# Altium PCB CloudKon_WifiRelay.PcbDoc
Units mm, origin at the board's own origin, x right, y up, seen from the top; angles counter-clockwise.
Board outline 152.4 x 101.6 mm, 2 copper layers (Top Layer, Bottom Layer); 31 components, 20 nets, 110 pads, 48 vias.
Unrouted connection lines stored in the file: 2.
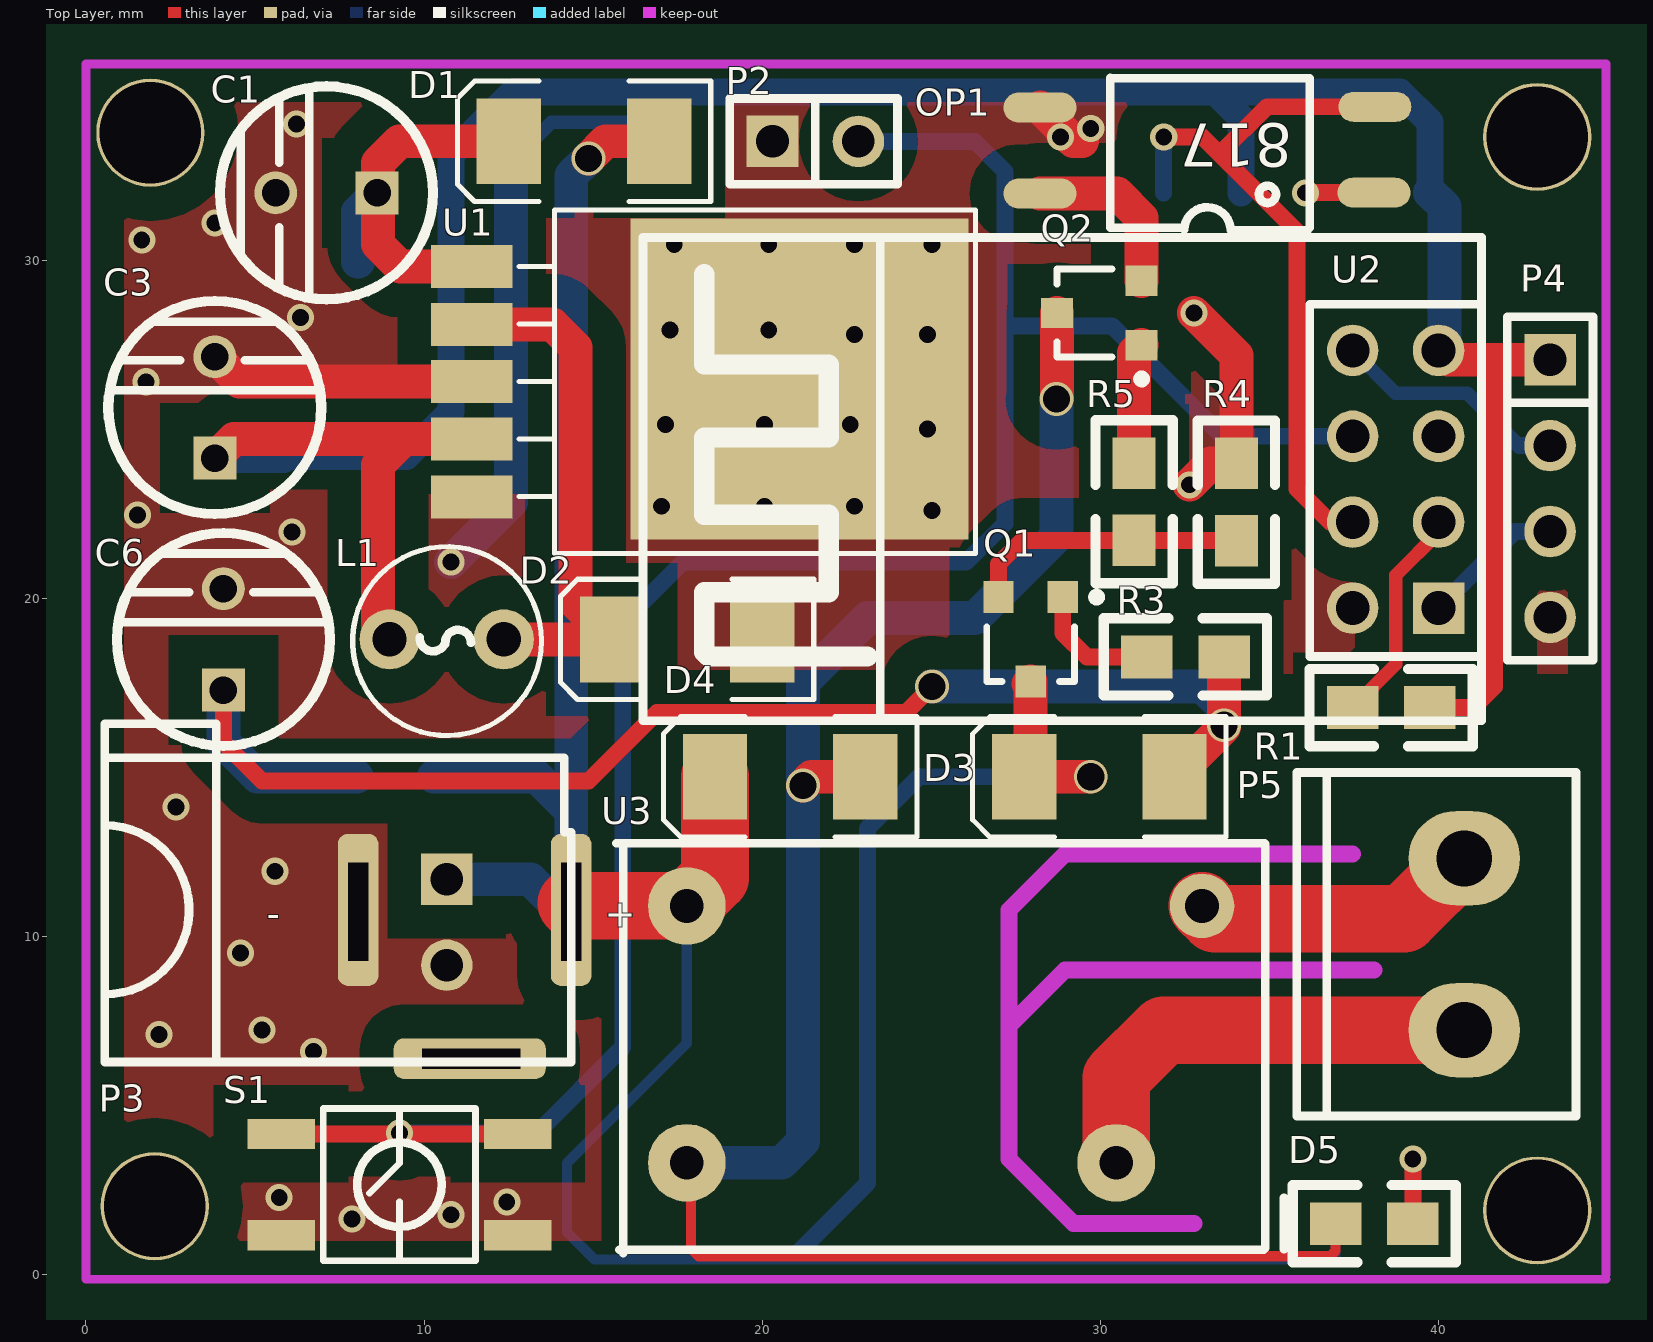
[diagram p0: Top Layer view]
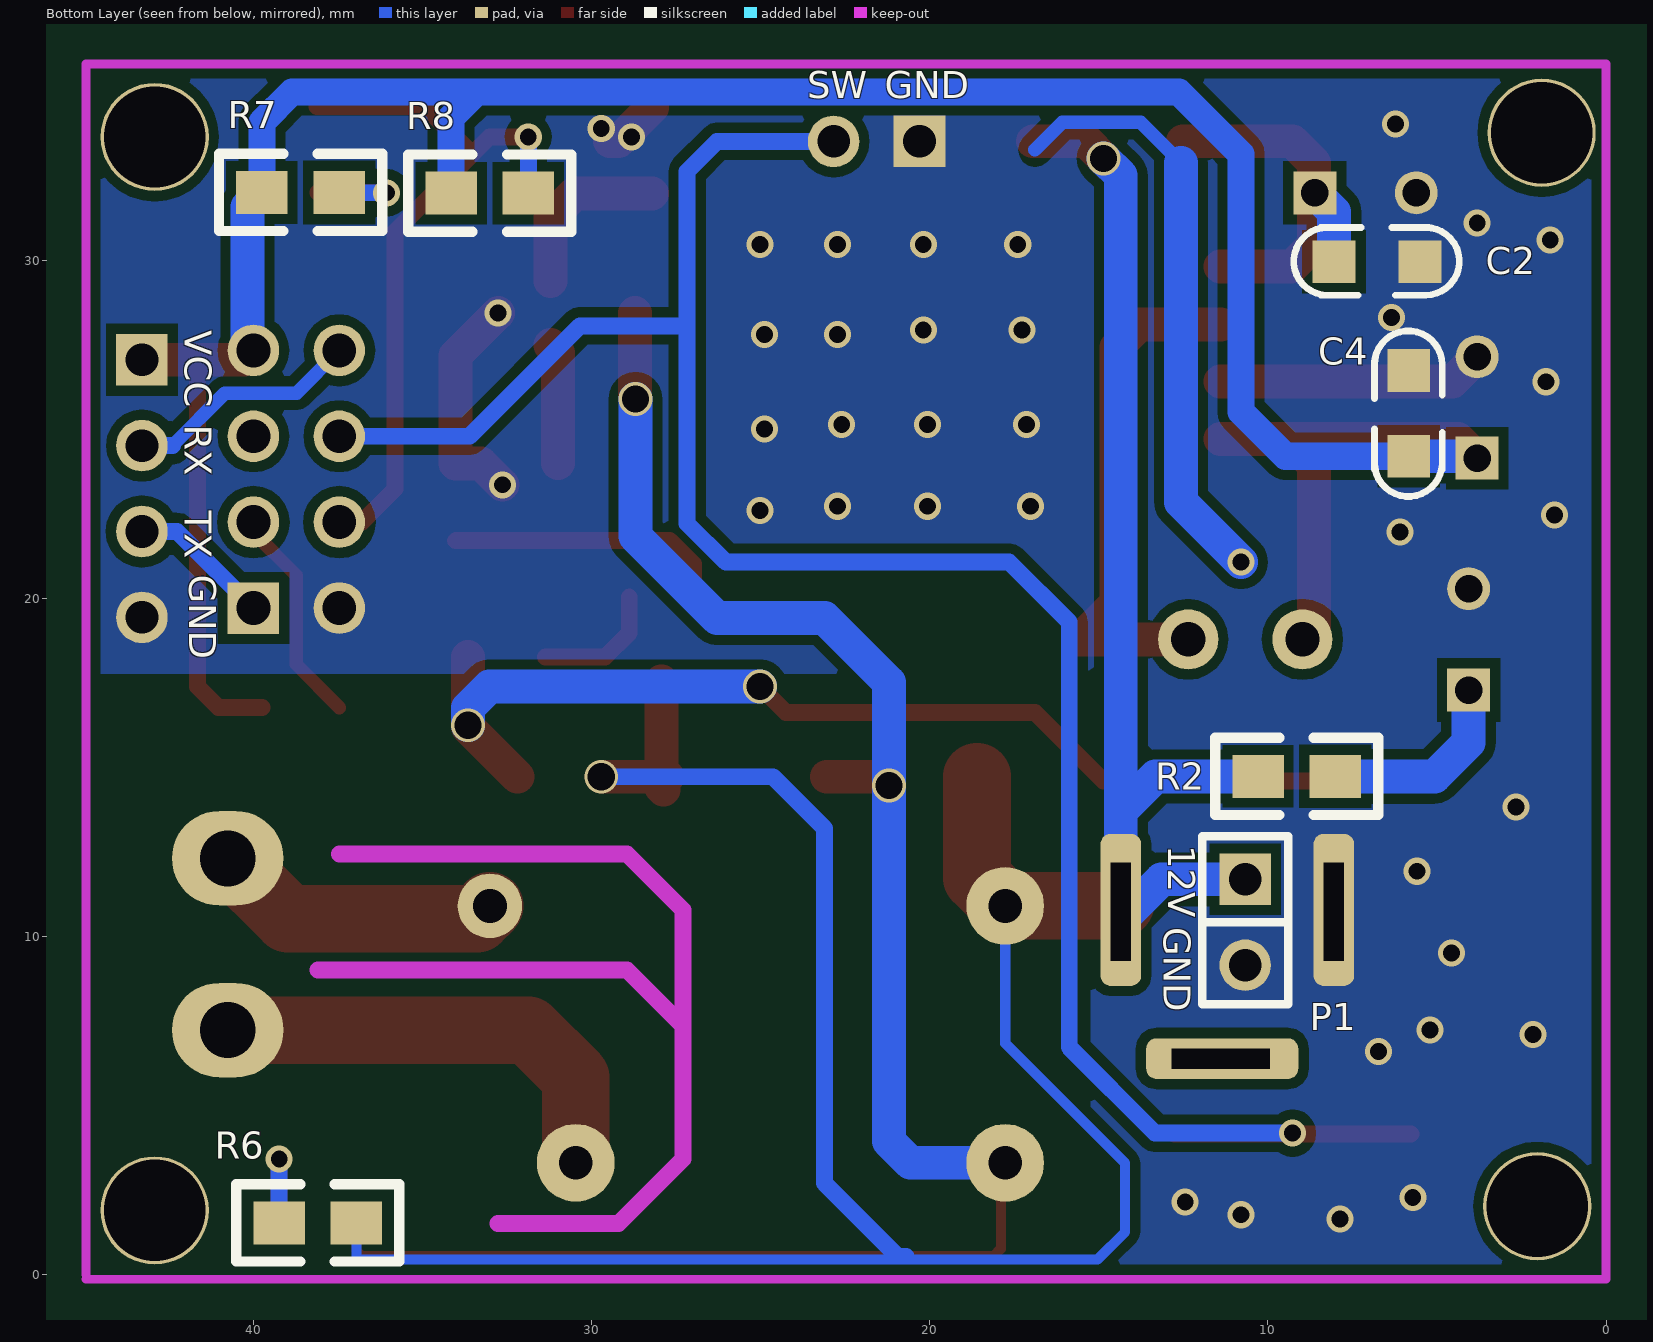
[diagram p1: Bottom Layer view, seen from below]

## Layer stack, top to bottom
Top Solder: solder mask 0.0102, Solder Resist, Dk 3.5
Top Layer: signal copper 0.0356
Dielectric1: dielectric 0.32, FR-4, Dk 4.8
Bottom Layer: signal copper 0.0356
Bottom Solder: solder mask 0.0102, Solder Resist, Dk 3.5

## Board outline
-37.465,-40.005 114.935,-40.005 114.935,61.595 -37.465,61.595

## Design rules (kind name [scope] priority, off if disabled: settings)
Clearance [All] p1: gap=0.3
FabricationTestPointUsage TestPointUsage [All] p1: valid=0 allowmultiple=FALSE
FabricationTestpoint Testpoint [All] p1: side=3 testpointundercomponent=TRUE minsize=1.016 maxsize=2.54 preferedsize=1.524 minholesize=0 maxholesize=1.016 preferedholesize=0.813 testpointgrid=0.025 allowsidetop=TRUE allowsidebottom=TRUE usegrid=TRUE gridtolerance=0
PlaneConnect [All] p1: planeconnectstyle=Relief reliefexpansion=0.508 reliefentries=4 reliefconductorwidth=0.508 reliefairgap=0.508
PolygonConnect [All] p1: connectstyle=Direct reliefconductorwidth=0.508 reliefentries=4 polygonreliefangle="90 Angle" airgapwidth=0.254
RoomDefinition CloudKon_WifiRelay [InComponentClass('CloudKon_WifiRelay')] p1: confinementstyle=ConfineIn formatcopy=TRUE lockcomponents=FALSE outline -62.865,-65.405 -12.065,-65.405 -12.065,-40.005 -62.865,-40.005
RoutingVias [All] p1: holewidth=0.711 width=1.27 viastyle="Through Hole" minholewidth=0.711 minwidth=1.27 maxholewidth=0.711 maxwidth=1.27
SilkToSolderMaskClearance SilkscreenOverComponentPads [IsPad] p1: minsilkscreentomaskgap=0.254 clearancetoexposedcopper=TRUE
SolderMaskExpansion [All] p1: expansion=0.102
Width [All] p1: maxlimit=2 minlimit=0.254 preferedwidth=0.5
26 further rules are at their usual default settings.

## Components (designator, comment, footprint, x,y, rotation, side; value= is the part's Value field where it differs from the comment)
C1 "Ecap_25V/100uf" "sip-cap-100uf-25v - duplicate" 7.112,32.004 r180 top
C2 "104" 0805_Cap 6.604,29.972 r0 bottom
C3 "Ecap_25V/100uf" "sip-cap-100uf-25v - duplicate" 3.81,25.654 r90 top
C4 "104" 0805_Cap 5.842,25.654 r270 bottom
C6 "Ecap_25V/100uf" "sip-cap-100uf-25v - duplicate" 4.064,18.796 r90 top
D1 "Diode_M7" M7 14.732,33.528 r90 top
D2 "Diode_SS14" M7 17.78,18.796 r90 top
D3 "Diode_SS14" M7 29.972,14.732 r90 top
D4 "Diode_SS14" M7 20.828,14.732 r90 top
D5 "LED_0805" 0805_LED 38.1,1.524 r180 top
L1 "220uH" LL_1A 10.668,18.796 r270 top
OP1 "EL817" E817-SMD 38.1,32.004 r90 top
P1 "HT5.08-2P" sip2 10.668,11.684 r270 bottom
P2 "HT5.08-2P" sip2 20.32,33.528 r0 top
P3 "DC-005" DC-5.5-2.1mm 14.351,10.795 r0 top
P4 "Esp8266_debug" sip4 43.307,27.051 r270 top
P5 "HT5.08-2P" HP2PA-5.08 40.767,7.239 r90 top
Q1 "NPN_S8050" SOT-23 27.94,18.796 r180 top
Q2 "NPN_S8050" SOT-23 29.972,28.448 r90 top
R1 "10K_1%" 0805_Res 38.608,16.764 r0 top
R2 "150K_1%" 0805_Res 9.144,14.732 r180 bottom
R3 "6K8_5%" 0805_Res 32.512,18.288 r180 top
R4 "6K8_5%" 0805_Res 34.036,22.86 r90 top
R5 "6K8_5%" 0805_Res 30.988,22.86 r270 top
R6 "2K_5%" 0805_Res 38.1,1.524 r180 bottom
R7 "100R_5%" 0805_Res 38.608,32.004 r180 bottom
R8 "5K1_5%" 0805_Res 33.02,32.004 r0 bottom
S1 "Switch_6*6*5" 4.5*4.5MM_SW 9.271,2.667 r0 top
U1 "LM2576S-3.3" LM2575-1 16.256,26.416 r0 top
U2 "ESP8266-1" ESP8266-1 41.275,16.383 r90 top
U3 "HF_Relay" JZ-32F-A 25.4,7.112 r0 top

## Footprints (in the part's own frame and the unit in brackets; to place one, negate y for a bottom-side part, rotate by r counter-clockwise, add the part's x,y. Pads: shape width x height; smd on the part's side, far side on the other; paste and mask are expansions set on the pad)
4.5*4.5MM_SW [mm]
  rect 2x0.9 smd: 1(-3.5,1.5) 1(3.5,1.5) 2(-3.5,-1.5) 2(3.5,-1.5)
  silkscreen extent -2.25,-2.25 2.25,2.25
0805_Cap [mm]
  rect 1.27x1.27 smd: 1(-1.097,0.007) 2(1.443,0.007)
  silkscreen extent -2.26,-1 2.63,1
0805_LED [mil]
  rect 60x50 smd: 1(-45.18,0.46) 2(44.82,0.46)
  silkscreen extent -95,-45 105,45
0805_Res [mil]
  rect 60x50 smd: 1(-45.18,0.46) 2(44.82,0.46)
  silkscreen extent -95,-45 95,45
DC-5.5-2.1mm [mm]
  rrect50% 0.6x0.6 / inner round 0 / far side round 0 hole 0.6 square: 1(0,-1.2) 1(0,-0.9) 1(0,-0.6) 1(0,-0.3) 1(0,0.2) 1(0,0.5) 1(0,0.8) 1(0,1.1) 2(-6.3,-1.2) 2(-6.3,-0.9) 2(-6.3,-0.6) 2(-6.3,-0.3) 2(-6.3,0.2) 2(-6.3,0.5) 2(-6.3,0.8) 2(-6.3,1.1) 3(-4.1,-4.4) 3(-3.9,-4.4) 3(-3.5,-4.4) 3(-2.5,-4.4) 3(-2.25,-4.4) 3(-2,-4.4) 3(-1.8,-4.4)
  rrect50% 1.2x4.5 hole 0.6 square: 1(0,0) 2(-6.3,0)
  rrect50% 4.5x1.2 hole 0.6 square: 3(-3,-4.4)
  silkscreen extent -13.8,-4.5 0,5.5
E817-SMD [mil]
  oval 35x85 smd: 1(0.16,0.18) 2(100.16,-0.82) 3(99.16,389.18) 4(-0.84,389.18)
  silkscreen extent -44,75 134,307
ESP8266-1 [mm]
  rect 1.524x1.524 hole 1: 1(3.34,1.27)
  round 1.524 hole 1: 2(5.88,1.27) 3(8.42,1.27) 4(10.96,1.27) 5(10.96,3.81) 6(8.42,3.81) 7(5.88,3.81) 8(3.34,3.81)
  silkscreen extent 0,0 14.3,24.8
HP2PA-5.08 [mil]
  oval 110x130 hole 65: 1(0,0) 2(200,0)
  silkscreen extent -100,-130 300,195
JZ-32F-A [mm]
  round 2.3 hole 1: 1(5.071,-3.798) 4(-7.629,3.802) 5(-7.629,-3.798)
  round 1.905 hole 1: 2(7.611,3.802)
  silkscreen extent -9.72,-6.47 9.48,5.65
LL_1A [mil]
  round 70 hole 40: 1(0,66.5) 2(0,-66.5)
  silkscreen extent -108,-109 112,110
LM2575-1 [mil]
  rect 393.7x374.02 smd: 0(190.92,3.07)
  rect 95x50 smd: 1(-190.92,134.08) 2(-190.92,66.51) 3(-190.92,0.31) 4(-190.92,-66.69) 5(-190.92,-134.08)
  silkscreen extent -136,-200 396,200
M7 [mil]
  rect 100x75 smd: A(0,-87.5) K(0,87.5)
  silkscreen extent -70,-147 70,148
sip2 [mil]
  rect 60x60 hole 38: 1(-0.6,-0.17)
  round 60 hole 38: 2(99.4,-0.17)
  silkscreen extent -51,-50 145,50
sip4 [mil]
  rect 60x60 hole 38: 1(-0.6,-0.17)
  round 60 hole 38: 2(99.4,-0.17) 3(199.4,-0.17) 4(299.4,-0.17)
  silkscreen extent -51,-50 349,50
"sip-cap-100uf-25v - duplicate" [mm]
  rect 1.27x1.27 hole 0.813: 1(-1.5,0)
  round 1.27 hole 0.813: 2(1.5,0)
  silkscreen extent -3.15,-3.15 3.15,3.15
SOT-23 [mm] "SOT-23; 3 Leads; Body 3.0 x 2.6 mm, inc. leads (LxW max)"
  rect 0.9x0.95 smd: 1(-0.95,-1.25) 2(0.95,-1.25) 3(0,1.25)
  silkscreen extent -2.08,-1.37 1.3,1.25

## Part data
C1 C3 C6: "https://item.taobao.com/item.htm?spm=a1z10.5-c.w4002-11020631983.33.qoX6of&id=7423722992"
C2 C4: library part Cap_%10, "https://item.taobao.com/item.htm?spm=a1z09.2.0.0.hNveX1&id=9716419590&_u=7ok62qs2673"
D1: "https://item.taobao.com/item.htm?spm=a1z10.3-c.w4002-11020657456.37.E0r8Bv&id=2891923922"
D2 D3 D4: "https://item.taobao.com/item.htm?spm=a1z10.3-c.w4002-11020657456.14.qD67rq&id=6126767310"
D5: "https://item.taobao.com/item.htm?spm=a1z10.3-c.w4002-11020657456.51.Ytz1qg&id=5169670346"
L1: library part LL_220uH, "https://item.taobao.com/item.htm?spm=a1z10.3-c.w4002-11020657456.14.KHn9vQ&id=8986036232"
OP1: "https://item.taobao.com/item.htm?spm=a1z10.3-c.w4002-11020657456.9.xiQJya&id=9840822052"
P1 P2 P5: "https://item.taobao.com/item.htm?spm=a1z10.3-c.w4002-11020657456.22.46QWsT&id=19327735027"
P3: "https://item.taobao.com/item.htm?spm=a1z10.3-c.w4002-11020657456.12.3OzBHB&id=5709638982"
P4: "https://item.taobao.com/item.htm?spm=a1z10.3-c.w4002-11020657456.14.NtUqGh&id=6097555742"
Q1 Q2: "https://item.taobao.com/item.htm?spm=a1z10.3-c.w4002-11020657456.15.ysrU5Y&id=5957247576"
R1 R2 R3 R4 R5 R6 R7 R8: library part Res_%5, "https://item.taobao.com/item.htm?spm=a1z10.3-c.w4002-11020657456.13.233szV&id=14686636311"
S1: "https://item.taobao.com/item.htm?spm=a1z10.3-c.w4002-11020657456.46.btOzYB&id=6756135544"
U1: "https://item.taobao.com/item.htm?spm=a1z10.3-c.w4002-11020657456.21.xl3HJG&id=6674225198"
U2: "https://item.taobao.com/item.htm?spm=a1z10.3-c.w4002-5350375195.29.OjbIzM&id=40328222213"
U3: "https://item.taobao.com/item.htm?spm=a1z10.1-c.w9983160-11020631947.1.6Rxoz9&id=10387236348"

## Free pads (board coordinates)
  round 3.2 hole 3: 0(1.905,33.782) 0(2.032,2.032) 0(42.926,1.905) 0(42.926,33.655)

## Via types
v1: diameter 0.8, hole 0.5, Top Layer to Bottom Layer, 42 vias
v2: diameter 1, hole 0.8, Top Layer to Bottom Layer, 6 vias

## Nets (pads, with @x,y where several pads share a name; then routed paths per layer and width w, separated by ;. In a path a pad name is that pad's centre, name@x,y a point inside that pad or via, vN(x,y) a via of type N, cw(c..) or ccw(c..) an arc to the next point about the centre after c; other vN are vias at no path point)
COM: P5.1 U3.1 | length 13.4
  Top Layer w2: U3.1 30.471,5.833 31.877,7.239 P5.1
GND: C1.2 C2.1 C3.2 C4.1 C6.2 D2.A OP1.3 P1.2 P2.1 P3.2 P4.4 R4.2 S1.2 U1.0 U1.3 U1.5 U2.8 | length 33.9
  Top Layer w1: C3.2 4.54,26.424 U1.3 ; OP1.3 29.209,33.528 29.464,33.528 ; v1(32.639,23.368) 33.269,23.998 R4.2 34.024,27.19 v1(32.766,28.448)
  Bottom Layer w0.4: 12.573,32.893 13.767,34.087 16.078,34.087 16.891,33.274
  Bottom Layer w1: v1(10.795,21.082) 12.573,22.86 12.573,32.893
  other v1: 7.874,1.651 10.795,1.778 12.446,2.159 5.715,2.286 6.731,6.604 2.159,7.112 5.207,7.239 4.572,9.525 5.588,11.938 2.667,13.843 6.096,21.971 1.524,22.479 25.019,22.606 17.018,22.733 20.066,22.733 22.733,22.733 24.892,25.019 17.145,25.146 20.066,25.146 22.606,25.146 1.778,26.416 22.733,27.813 24.892,27.813 17.272,27.94 20.193,27.94 6.35,28.321 17.399,30.48 20.193,30.48 22.733,30.48 25.019,30.48 1.651,30.607 3.81,31.115 28.829,33.655 29.718,33.909 6.223,34.036
NetC1_1: C1.1 C2.2 D1.K U1.1 | length 11.9
  Top Layer w1: C1.1 C1.1@8.636,31.98 ; U1.1 9.294,29.822 8.636,30.48 C1.1@8.636,31.98 ; D1.K 9.271,33.528 8.636,32.893 C1.1@8.636,31.98
  Bottom Layer w1: C2.2 8.047,31.439 C1.1
NetC6_1: C6.1 D3.A R2.2 R3.1 | length 43.8
  Top Layer w0.5: C6.1 4.064,15.748 5.207,14.605 14.859,14.605 16.891,16.637 24.257,16.637 v2(25.019,17.399) v2@25.146,17.526
  Top Layer w1: D3.A 33.66,16.197 R3.1
  Bottom Layer w1: C6.1 4.064,15.748 5.068,14.744 R2.2 ; v2(25.019,17.399) 33.02,17.399 33.655,16.764 v2(33.655,16.256)
NetD2_K: D2.K L1.1 U1.2 | length 15.6
  Top Layer w1: U1.2 13.805,28.105 14.478,27.432 14.478,19.875 D2.K L1.1
NetD4_A: D4.A D5.2 Q2.3 U3.5 | length 57.7
  Top Layer w0.3: U3.5 17.898,3.187 17.898,0.771 18.119,0.55 36.803,0.55 36.962,0.709 D5.2
  Top Layer w1: v2(21.209,14.478) 21.463,14.732 D4.A ; v2@28.722,25.928 Q2.3
  Bottom Layer w1: U3.5 20.574,3.314 21.209,3.949 v2(21.209,14.478) 21.209,17.526 23.114,19.431 26.289,19.431 28.702,21.844 v2(28.702,25.908)
NetD5_1: D5.1 R6.1 | length 3.8
  Top Layer w0.5: v1(39.243,3.429) 39.248,3.424 D5.1
  Bottom Layer w0.5: R6.1 v1@39.248,3.424
NetOP1_1: OP1.1 R7.2 | length 3.4
  Top Layer w0.5: v1(36.068,32.004) 36.072,32.008 OP1.1
  Bottom Layer w0.5: v1(36.068,32.004) 37.458,32.004 R7.2
NetOP1_4: OP1.4 Q2.2 | length 5.2
  Top Layer w1: OP1.4 30.501,31.983 31.222,31.262 Q2.2
NetP2_2: P2.2 S1.1 U2.6 | length 66.5
  Top Layer w0.5: S1.1@5.771,4.167 S1.1@12.771,4.167
  Bottom Layer w0.5: v1(9.271,4.191) 13.335,4.191 15.875,6.731 15.875,19.304 17.653,21.082 26.035,21.082 27.178,22.225 27.178,28.067 ; P2.2 26.293,33.524 27.178,32.639 27.178,28.067 ; U2.6 33.617,24.803 30.353,28.067 27.178,28.067
NetQ1_1: Q1.1 R3.2 | length 3.8
  Top Layer w0.5: Q1.1 28.89,18.989 29.603,18.276 R3.2
NetQ1_2: Q1.2 R4.1 R5.2 | length 8.3
  Top Layer w0.5: Q1.2 26.99,21.021 27.691,21.722 R5.2 34.015,21.722 R4.1
NetQ2_1: Q2.1 R5.1 | length 3.6
  Top Layer w1: R5.1 31,27.276 Q2.1
NetR1_1: R1.1 U2.2 | length 6.5
  Top Layer w0.4: R1.1 38.743,18.058 38.743,20.692 40.005,21.954 U2.2
OUT: P5.2 U3.2 | length 9.2
  Top Layer w0.3: 38.6,10.914 38.981,10.533
  Top Layer w2: U3.2 33.392,10.533 38.981,10.533 P5.2
RELAYCON: OP1.2 R8.1 U2.7 | length 21.6
  Top Layer w0.5: v1(31.877,33.655) 33.02,33.655 33.528,33.147 ; U2.7 36.792,22.263 35.814,23.241 35.814,30.861 33.528,33.147 ; OP1.2 34.929,34.548 33.528,33.147
  Bottom Layer w0.5: R8.1 v1@31.872,33.65
VCC_3.3: C3.1 C4.2 L1.2 P4.1 R1.2 R7.1 R8.2 U1.4 U2.4 | length 85.2
  Top Layer w0.5: R1.2 41.033,16.776 41.656,17.399 41.656,26.685 42.037,27.066
  Top Layer w1: C3.1 4.378,24.722 9.398,24.722 ; L1.2 8.636,19.139 8.636,23.96 9.398,24.722 ; U1.4 9.398,24.722 ; U2.4 40.282,27.066 42.037,27.066 P4.1
  Bottom Layer w0.8: C4.2 9.479,24.211 10.795,25.527 10.795,33.147 12.635,34.987 33.401,34.987 ; R8.2 34.158,34.23 33.401,34.987 ; R7.1 39.756,34.093 38.862,34.987 33.401,34.987
  Bottom Layer w1: C3.1 3.867,24.211 C4.2 ; R7.1 40.178,31.594 40.178,29.584 40.178,27.516 U2.4
VCC_12V: D1.A D3.K D4.K P1.1 P3.1 Q1.3 R2.1 R6.2 U3.4 | length 104.2
  Top Layer w1: v2(14.859,33.02) 15.367,33.528 D1.A ; D3.K v2(29.718,14.732) ; D3.K@27.876,14.351 27.94,14.415 Q1.3 Q1.3@27.876,17.482
  Top Layer w2: P3.1@14.351,10.995 14.432,10.914 U3.4 18.605,11.749 D4.K
  Bottom Layer w0.3: U3.4 17.771,6.849 14.224,3.302 14.224,1.27 15.044,0.45 36.899,0.45 36.962,0.513 R6.2
  Bottom Layer w0.5: 20.701,0.55 20.955,0.55 22.013,1.608 ; 21.082,0.677 22.013,1.608 ; v2(29.718,14.732) 24.638,14.732 23.114,13.208 23.114,2.709 22.013,1.608
  Bottom Layer w1: R2.1 13.323,14.744 14.351,13.716 ; P1.1 13.147,11.699 14.201,10.645 P3.1@14.351,10.495 ; P3.1@14.351,10.195 P3.1@14.351,10.495 ; P3.1@14.351,10.995 14.351,10.795 P3.1@14.351,10.495 ; P3.1@14.351,11.295 14.351,11.595 14.351,11.895 14.351,13.716 ; v2(14.859,33.02) 14.351,32.512 14.351,13.716
WIFI_RX: P4.2 U2.5 | length 7
  Bottom Layer w0.4: U2.5 38.727,26.081 40.848,26.081 42.403,24.526
  Bottom Layer w0.5: 42.403,24.526 P4.2
WIFI_TX: P4.3 U2.1 | length 4.2
  Bottom Layer w0.5: U2.1 42.268,21.986 P4.3
pads on no net: P3.3 U2.3

## Polygon pours and split planes (outlines as drawn)
GND on Bottom Layer "Bottom Layer-No Net" (solid, remove dead copper, pour order 1001): 44.958,17.78 15.24,17.78 15.24,-0.127 0,-0.127 0,35.814 44.958,35.814
GND on Top Layer "Bottom Layer-No Net" (solid, remove dead copper, pour order 1000): 44.831,17.78 43.307,17.78 15.24,17.78 15.24,13.081 15.24,-0.127 0,-0.127 0,35.814 44.958,35.814

## Keep-outs
Keep-Out Layer:
  lines w0.254: 44.958,-0.127 0,-0.127 0,1.016 0,35.814 44.958,35.814 44.958,0
  lines w0.5: 32.766,1.524 29.21,1.524 27.305,3.429 27.305,7.366 ; 37.465,12.446 33.528,12.446 28.956,12.446 27.305,10.795 27.305,7.366 ; 38.1,9.017 32.004,9.017 28.956,9.017 27.305,7.366

## Silkscreen, mask and mechanical layers (free items; w line width, h text height)
Bottom Overlay:
  text "GND" at 21.336,34.798 h0.8
  text "SW" at 23.622,34.798 h0.8
  text "VCC" at 42.037,27.94 h0.8 r90
  text "RX" at 42.037,25.146 h0.8 r90
  text "TX" at 42.037,22.606 h0.8 r90
  text "GND" at 41.91,20.701 h0.8 r90
  text "12V" at 12.954,12.7 h0.8 r90
  text "GND" at 13.081,10.287 h0.8 r90

## Text inside footprints (layer, text, board x,y; h text height)
OP1: Top Overlay "817" at 35.682,34.04 h1.27 r180
P3: Top Overlay "+" at 15.351,10.295 h0.8; Top Overlay "-" at 5.351,10.295 h0.8